# Altium PCB Hauptplatine.PcbDoc (part 2 of 3)
Units mm, origin at the board's own origin, x right, y up, seen from the top; angles counter-clockwise.
Board outline 110.5 x 110.5 mm, 4 copper layers (Top Layer, GND, POWER, Bottom Layer), stack 0.551 mm thick; 103 components, 92 nets, 407 pads, 378 vias.
Unrouted connection lines stored in the file: 3.
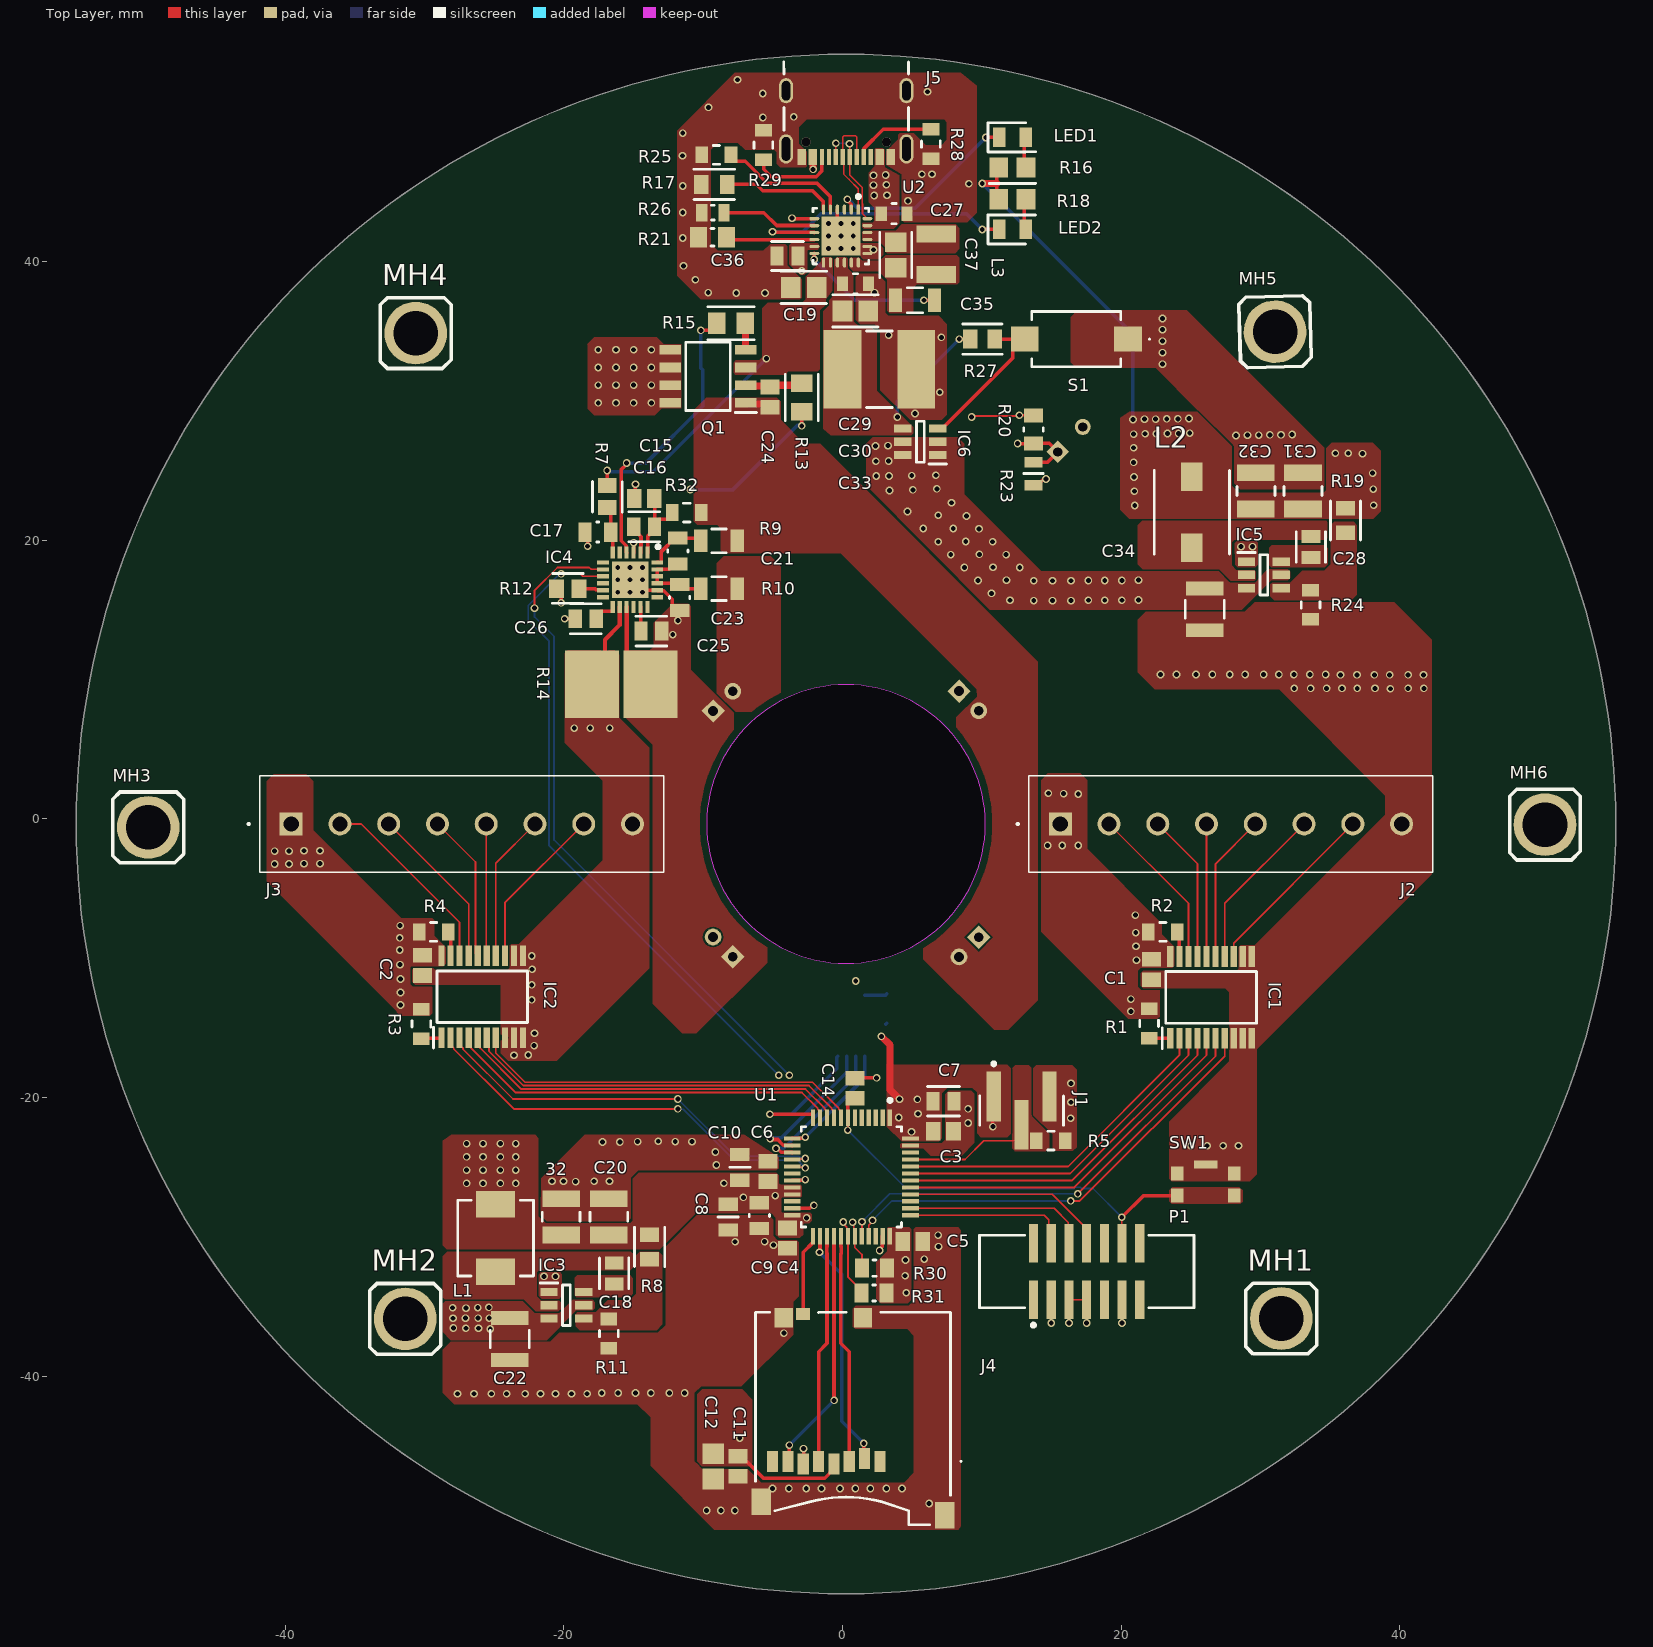
[diagram p0: Top Layer view]

## Part data (continued)
U1: library part CMP-12105-000030-1, "MAINSTREAM ARM CORTEX-M4+ MCU 17", Ambient Temperature Range High=+85°C, Ambient Temperature Range Low=-40°C, Frequency=170MHz, Manufacturer=STMicroelectronics, Max Junction Temp=+105°C, Max Supply Voltage=3.6V, Min Supply Voltage=1.62V, Package=LQFP48-5B, Temperature="-40°C to +85°C", Automotive=No, Category=IC, ComponentLink2Description=Datasheet, ComponentLink2URL=https://www.st.com/resource/en/datasheet/stm32g431cb.pdf, Core Architecture="Arm Cortex-M4", Data Bus Width=32bits, Device Class L1="Integrated Circuits (ICs)", Device Class L2="Embedded Processors and Controllers", Device Class L3=Microcontrollers, Digikey Description="MAINSTREAM ARM CORTEX-M4+ MCU 17", Height=1.6mm, Interface=I2C,SPI,UART,USART,CAN,USB,LIN,IrDA,I2S, Lead Free=Yes, Manufacturer Part Number=STM32G431CBT6, Memory Size=128KBytes, Memory Type=FLASH, Number Of A/D Converters=1, Number Of Adc Channels=17, Number Of Cores=1, Number Of I2C Channels=3, Number Of I/Os=38, Number Of Pwm Channels=31, Number Of Spi Channels=3, Number Of Timers/Counters=14, Number Of Uart Channels=4, Number Of Usb Channels=1, Octopart=https://octopart.com/stm32g431cbt6-stmicroelectronics-98835224, Ram Size=32KBytes, RoHS=TRUE, Standoff Height=0.05mm, Temperature Range High=+85°C, Temperature Range Low=-40°C
U2: library part CMP-04911-000046-1, "PWR MGMT BATTERY MGMT"

## Via types
v1: diameter 0.55, hole 0.35, Top Layer to Bottom Layer, tented both sides, 378 vias

## Nets (pads, with @x,y where several pads share a name; then routed paths per layer and width w, separated by ;. In a path a pad name is that pad's centre, name@x,y a point inside that pad or via, vN(x,y) a via of type N, cw(c..) or ccw(c..) an arc to the next point about the centre after c; other vN are vias at no path point)
3V3: 32.1 B1.5 C3.2 C4.2 C5.2 C6.2 C7.1 C8.1 C9.1 C10.1 C11.1 C12.2 C13.2 C20.1 J1.1 J4.P4 L1.2 P1.3 R6.1 R8.2 R30.2 R31.2 U1.1 U1.20 U1.21 U1.24 U1.36 U1.48 | length 18.7
  Top Layer w0.125: v1(14.986,-36.195) P1.3@14.986,-34.52
  Top Layer w0.254: C12.2@-9.473,-45.784 C12.2@-9.271,-45.582 ; C12.2@-9.271,-45.941 C12.2@-9.039,-45.709 ; C11.1@-7.5,-45.5 -5.67,-47.33 -1.265,-47.33 -0.613,-46.678 J4.P4@-0.613,-46.328 ; U1.36@3.412,-30.353 U1.36@3.409,-30.35 ; v1(10.795,-22.098) 10.795,-20.003 J1.1@10.859,-19.939 ; U1.36@3.409,-30.35 3.409,-29.983 U1.36@3.389,-29.963 3.389,-30.33 U1.36@3.409,-30.35
  Top Layer w0.508: v1(2.794,-15.621) 3.425,-16.252 3.425,-19.46 v1(4.095,-20.13)
  Bottom Layer w0.254: R6.1@3.094,-14.754 R6.1@3.175,-14.673
  other v1: -7.375,-44.45 4.575,-34.025 4.5,-32.8 4.525,-31.675 -2.575,-28.65 -7.112,-27.178 -4.826,-27.051 -26.975,-26.175 -25.8,-26.175 -24.55,-26.175 -23.45,-26.175 -8.509,-26.162 -26.975,-25.225 -25.8,-25.225 -24.55,-25.225 -23.45,-25.225 -26.975,-24.275 -25.8,-24.275 -24.55,-24.275 -23.45,-24.275 -26.975,-23.325 -25.8,-23.325 -24.55,-23.325 -23.45,-23.325 4.953,-22.479 4.043,-21.447 5.421,-21.177 5.377,-20.147
5V: C1.2 C2.2 C31.1 C32.1 IC1.20 IC2.20 J2.1 J3.1 L2.2 R1.1 R2.1 R3.1 R4.1 R16.2 R18.2 R19.2 | length 25.2
  Top Layer w0.254: C2.2@-30.569,-9.997 C2.2@-30.469,-9.898 ; R4.1@-30.514,-8.001 R4.1@-30.387,-8.128 ; C2.2@-30.27,-9.699 C2.2@-30.171,-9.599 ; R18.2@11.089,44.45 11.089,45.593 R16.2@11.089,46.736
  Top Layer w0.508: v1(10.033,45.593) 11.089,45.593
  Bottom Layer w0.254: v1(10.033,45.593) 20.85,34.776 v1(20.85,28.65)
  other v1: 20.7,-13.825 -31.726,-13.376 20.7,-12.95 -31.726,-12.476 -31.725,-11.5 -31.751,-10.476 21.1,-10.15 -31.776,-9.426 21.07,-9.153 -31.775,-8.55 21.05,-8.175 -31.75,-7.675 21.025,-6.925 -40.751,-3.251 -39.726,-3.251 -38.651,-3.226 -37.501,-3.226 -40.751,-2.326 -39.726,-2.326 -38.651,-2.301 -37.501,-2.301 14.725,-1.925 15.775,-1.925 16.925,-1.925 16.925,1.775 15.875,1.8 14.775,1.825 20.975,22.475 38.125,22.5 20.95,23.5 38.1,23.65 20.925,24.525 38.05,24.8 20.9,25.575 37.325,26.2 35.375,26.225 36.3,26.225 20.9,26.625 20.9,27.6 21.725,27.625 22.525,27.625 23.325,27.65 24.125,27.65 24.925,27.675 21.675,28.675 22.475,28.675 23.275,28.7 24.075,28.7 24.875,28.725
BMS_SCL: IC4.8 R30.1 U1.31 | length 64
  Top Layer w0.125: v1(-22.098,15.113) -22.098,16.388 -20.453,18.033 -18.168,18.033 -18.03,17.895 -17.236,17.895 IC4.8@-17.213,17.918 ; v1(0.728,-28.966) 0.809,-29.046 0.809,-29.883 U1.31@0.889,-29.963 0.889,-30.775 1.397,-31.283 R30.1@1.397,-32.258
  GND w0.125: v1(-3.81,-18.415) -3.81,-19.942 -1.29,-22.462 ; -1.288,-22.459 0.728,-24.476 v1(0.728,-28.966)
  Bottom Layer w0.125: v1(-22.098,15.113) -22.098,14.478 -20.701,13.081 -20.701,-1.524 v1(-3.81,-18.415)
BMS_SDA: IC4.9 R31.1 U1.30 | length 65.6
  Top Layer w0.125: v1(-20.193,17.57) -18.819,17.57 -18.643,17.395 IC4.9@-17.19,17.395 ; v1(0.054,-28.952) 0.054,-29.067 0.302,-29.315 0.302,-29.876 U1.30@0.389,-29.963 0.389,-32.875 1.375,-33.861 R31.1@1.375,-34.036
  Top Layer w0.254: IC4.9@-17.192,17.397 IC4.9@-17.19,17.395
  GND w0.125: v1(-4.572,-18.415) -4.572,-19.834 -1.27,-23.137 -1.265,-23.137 0.054,-24.455 v1(0.054,-28.952)
  Bottom Layer w0.125: v1(-20.193,17.57) -20.295,17.57 -22.561,15.305 -22.561,14.228 -21.055,12.723 -21.055,-1.932 v1(-4.572,-18.415)
BOOT: J1.2 R5.1 U1.45 | length 8.6
  Top Layer w0.125: U1.45@4.889,-24.463 8.796,-24.463 10.145,-23.114 J1.2@12.925,-23.114
CHG_FET: IC4.3 R13.1 | length 17.3
  Top Layer w0.254: IC4.3@-14.99,19.095 -14.988,19.097 -14.988,19.81 v1(-14.986,19.812) ; v1(-2.921,28.194) R13.1@-2.921,29.201
  POWER w0.254: v1(-14.986,19.812) -11.233,23.565 -10.979,23.565 v1(-10.922,23.622)
  Bottom Layer w0.254: v1(-10.922,23.622) -7.853,23.622 -3.255,28.221 -2.948,28.221 v1(-2.921,28.194)
D_N: J5.A7 J5.B7 U2.1 | length 8.2
  Top Layer w0.11: J5.B7@1.024,47.498 1.024,48.926 0.95,49 0.089,49 0.024,48.935 J5.A7@0.024,47.498 0.079,47.443 0.079,46.271 0.469,45.881 1.137,45.213 U2.1@1.137,43.721